# EAGLE board olm-flora-sqw-freescale (EAGLE 6.5.0)

Size 37.26 x 50.79 mm. Coordinates in mm from the lower left corner, seen from the top.
Outline: 0,0 37.26,0 37.26,50.79 0,50.79 0,0
Copper layers (1*16): Top 0.035mm / dielectric 1.5mm / Bottom 0.035mm
Design rules "default": minimum track width 10mil, minimum drill 24mil, track to track 8mil, track to pad 8mil, pad to pad 8mil, via to via 8mil, smd to smd 8mil, copper to edge 40mil, drill to drill 8mil, minimum pad ring 10mil, minimum via ring 8mil, stop-mask expansion 4mil, vias tented up to drill 0mil, thermal gap 10mil
Net classes: 1 power: width 0.203 mm, clearance 0.152 mm

## Footprints (pad centres in the part's own frame; a part is rotated, then mirrored left to right if it is on the bottom)
KMR2 = smd 1 x 1: 1 2,0.8; 2 2,-0.8; 3 -2,0.8; 4 -2,-0.8
C0805 = smd 1.3 x 1.5: 1 -0.85,0; 2 0.85,0
C0805K = smd 1.1 x 1.4: 1 -1,0; 2 1,0
CHIPLED_0805 = smd 1.2 x 1.2: A 0,-1.05; C 0,1.05
JST-PH-2-SMT-RA = smd 1 x 4.6: 1 1,-3.7; 2 -1,-3.7 | smd 1.6 x 3.4: NC1 -3.4,1.5; NC2 3.4,1.5
CON10 = drill 0.914: 1 -5.08,-1.27 | drill 0.914 octagon: 2 -5.08,1.27; 3 -2.54,-1.27; 4 -2.54,1.27; 5 0,-1.27; 6 0,1.27; 7 2.54,-1.27; 8 2.54,1.27; 9 5.08,-1.27; 10 5.08,1.27
SOD-123 = smd 1.2 x 0.7: A 1.85,0; C -1.85,0
TQFP44 = smd 1.5 x 0.5: 1 -5.8,4; 2 -5.8,3.2; 3 -5.8,2.4; 4 -5.8,1.6; 5 -5.8,0.8; 6 -5.8,0; 7 -5.8,-0.8; 8 -5.8,-1.6; 9 -5.8,-2.4; 10 -5.8,-3.2; 11 -5.8,-4; 23 5.8,-4; 24 5.8,-3.2; 25 5.8,-2.4; 26 5.8,-1.6; 27 5.8,-0.8; 28 5.8,0; 29 5.8,0.8; 30 5.8,1.6; 31 5.8,2.4; 32 5.8,3.2; 33 5.8,4 | smd 0.5 x 1.5: 12 -4,-5.8; 13 -3.2,-5.8; 14 -2.4,-5.8; 15 -1.6,-5.8; 16 -0.8,-5.8; 17 0,-5.8; 18 0.8,-5.8; 19 1.6,-5.8; 20 2.4,-5.8; 21 3.2,-5.8; 22 4,-5.8; 34 4,5.8; 35 3.2,5.8; 36 2.4,5.8; 37 1.6,5.8; 38 0.8,5.8; 39 0,5.8; 40 -0.8,5.8; 41 -1.6,5.8; 42 -2.4,5.8; 43 -3.2,5.8; 44 -4,5.8
SO16W = smd 0.6 x 2.2: 1 -4.445,-4.6; 2 -3.175,-4.6; 3 -1.905,-4.6; 4 -0.635,-4.6; 5 0.635,-4.6; 6 1.905,-4.6; 7 3.175,-4.6; 8 4.445,-4.6; 9 4.445,4.6; 10 3.175,4.6; 11 1.905,4.6; 12 0.635,4.6; 13 -0.635,4.6; 14 -1.905,4.6; 15 -3.175,4.6; 16 -4.445,4.6
SOT23-5 = smd 0.55 x 1.2: 1 -0.95,-1.3; 2 0,-1.3; 3 0.95,-1.3; 4 0.95,1.3; 5 -0.95,1.3
SOT23 = smd 1 x 1.4: 1 -0.95,-1.1; 2 0.95,-1.1; 3 0,1.1
AYZ0202 = smd 1 x 1.15: 1 -2.5,2.825; 2 0,2.825; 3 2.5,2.825; 4 -2.5,-2.825; 5 0,-2.825; 6 2.5,-2.825 | hole 0.85: 1.5,0; -1.5,0
2X03 = drill 1.016 octagon: 1 -2.54,-1.27; 2 -2.54,1.27; 3 0,-1.27; 4 0,1.27; 5 2.54,-1.27; 6 2.54,1.27
R1206 = smd 1.6 x 1.803: 1 -1.422,0; 2 1.422,0
R0805 = smd 1.1 x 1.4: 1 -1,0; 2 1,0
R0805' = smd 1.3 x 1.5: 1 -0.95,0; 2 0.95,0
EXB38V = smd 0.6 x 0.8: 1 -1.275,-0.75; 4 1.275,-0.75; 5 1.275,0.75; 8 -1.275,0.75 | smd 0.5 x 0.8: 2 -0.4,-0.75; 3 0.4,-0.75; 6 0.4,0.75; 7 -0.4,0.75
SO08 = smd 0.61 x 2.21: 1_CS -1.905,-2.616; 2_SO -0.635,-2.616; 3_WP 0.635,-2.616; 4_GND 1.905,-2.616; 5_SI 1.905,2.616; 6_SCK 0.635,2.616; 7_HOLD -0.635,2.616; 8_VCC -1.905,2.616
CR1220-SMD = smd 3.2 x 3.2: +$1 -8.2,0; +$2 8.2,0 | smd 3.9 x 3.9: - 0,0
USB-MINIB = smd 2.5 x 0.5: D+ 2.5,0; D- 2.5,0.8; GND 2.5,-1.6; ID 2.5,-0.8; VBUS 2.5,1.6 | smd 2.5 x 2: GND@1 -3,-4.5; GND@2 -3,4.5; GND@3 2.5,4.5; GND@4 2.5,-4.5 | hole 0.9: 0,2.2; 0,-2.2
NX5032 = smd 2 x 2.4: P$1 2,0; P$2 -2,0

## Placement (x,y rotation side)
BOOT  SPST_TACT-KMR2  [KMR2]  34.04,40.39 0 top
C1  10u  [C0805]  28.19,26.92 0 top
C2  18pF  [C0805K]  24.13,40.89 180 top
C3  18pF  [C0805K]  13.97,40.39 270 top
C4  0.1  [C0805K]  25.4,37.08 0 top
C10  10u  [C0805]  28.96,40.89 180 top
C11  10u  [C0805]  10.16,37.34 180 top
CHG  0805  [CHIPLED_0805]  12.95,22.1 90 top
CN2  [JST-PH-2-SMT-RA]  5.59,15.24 0 top
CON1  [CON10]  9.4,46.99 0 top
CON2  [CON10]  27.94,46.99 0 top
CON3  [CON10]  9.4,3.81 180 top
CON4  [CON10]  27.94,3.81 180 top
D1  SCHOTTKY  [SOD-123]  31.5,23.37 90 top
IC1  ATMEGA32U4-AU  [TQFP44]  18.8,30.48 135 top
IC2  DS3231SN  [SO16W]  18.8,14.73 0 top
IC3  MCP73831  [SOT23-5]  9.91,24.64 270 top
IC4  MCP1700-33  [SOT23]  34.04,28.45 0 top
J1  AYZ0202  [AYZ0202]  32,34.8 180 top
JP1  ICSP  [2X03]  3.3,38.61 90 top
L1  500mA  [R1206]  34.04,23.11 270 top
R1  22  [R0805]  8.89,28.45 90 top
R2  22  [R0805]  29.97,29.72 180 top
R3  10k  [R0805]  11.43,17.02 90 top
R4  10k  [R0805]  11.43,11.94 90 top
R5  10k  [R0805]  27.94,24.64 0 top
R6  10k  [R0805]  27.94,22.35 180 top
RC  22K  [R0805']  9.14,33.02 90 top
RN1  [EXB38V]  9.65,41.15 0 top
U$4  AT25F512BJEDEC  [SO08]  4.06,30.23 0 top
U$7  BAT  [CR1220-SMD]  18.8,15.24 0 bottom
X1  USBSMD  [USB-MINIB]  30.99,14.48 180 top
X3  8MHz  [NX5032]  18.54,40.64 180 top

## Library data of the parts
BOOT C2-C4 CN2 D1 IC4 L1 R1-R6 U$7 = adafruit
C1 C10 C11 = resistor
CHG = led
CON1-CON4 = con-harting; OC_FARNELL: unknown; OC_NEWARK: unknown
IC1 X3 = adaprog
IC2 = comfile
IC3 J1 = SparkFunNew
JP1 = pinhead
RC = rcl
RN1 = resistor-dil; OC_FARNELL: unknown; OC_NEWARK: unknown
U$4 = LowPowerLab
X1 = SparkFun

## Nets
32KHZ: IC2.1 R6.1
+3V3: C11.1 CON1.10 CON2.10 CON3.10 CON4.10 IC1.6 IC1.14 IC1.24 IC1.34 IC1.42 IC1.44 IC4.2
+5V: D1.A IC1.7 L1.2
A5: IC1.41
D0/RX: IC1.20
D1/TX: IC1.21
D6*: IC1.27
D7: IC1.1
D8: U$4.1_CS
GND: BOOT.2 BOOT.4 C1.2 C2.2 C3.2 C4.2 C10.2 C11.2 CN2.2 CON1.6 CON2.6 CON3.6 CON4.6 IC1.5 IC1.15 IC1.23 IC1.33 IC1.35 IC1.43 IC2.5 IC2.6 IC2.7 IC2.8 IC2.9 IC2.10 IC2.11 IC2.12 IC2.13 IC3.2 IC4.1 JP1.6 RC.1 U$4.4_GND U$7.- X1.GND
INT/SQW: IC2.3 R3.1
IO9*: IC1.29
IO10*: IC1.30
IO12*: IC1.26
MISO: CON1.5 CON2.5 CON3.5 CON4.5 IC1.11 JP1.1 U$4.2_SO
MOSI: CON1.3 CON2.3 CON3.3 CON4.3 IC1.10 JP1.4 U$4.5_SI
N$1: CHG.C IC3.1
N$2: R2.1 X1.D+
N$3: IC1.3 R1.2
N$4: IC1.4 R2.2
N$5: R1.1 X1.D-
N$8: C2.1 IC1.17 X3.P$2
N$9: C3.1 IC1.16 X3.P$1
N$10: IC3.5 RC.2
N$11: J1.3 J1.6
N$12: CHG.A RN1.4
N$14: CON1.4
N$15: CON1.2
N$16: CON1.9
N$17: CON1.7
PC6: IC1.31
PC7: IC1.32
PD0: IC1.18
PD1: IC1.19
RST: BOOT.1 BOOT.3 IC1.13 IC2.4 JP1.5
RXLED/SS: IC1.8
SCK: CON1.1 CON2.1 CON3.1 CON4.1 IC1.9 JP1.3 U$4.6_SCK
SCL: IC2.16 R4.1
SDA: IC2.15 R5.1
TXLED: IC1.22
VBAT: CN2.1 CON1.8 CON2.8 CON3.8 CON4.8 IC2.14 IC3.3 J1.2 J1.5 U$7.+$1 U$7.+$2
VBUS: C10.1 D1.C IC3.4 L1.1 RN1.5 X1.VBUS
VCC: C4.1 IC2.2 R3.2 R4.2 R5.2 R6.2 U$4.3_WP U$4.7_HOLD U$4.8_VCC
VDD: C1.1 IC4.3 J1.1 J1.4

## Tracks (layer width: path | path; a pad name or v marks a point on that pad's centre or on a via)
32KHZ  (1 unrouted)
+3V3  (11 unrouted)
+5V  (2 unrouted)
GND  (34 unrouted)
INT/SQW  (1 unrouted)
MISO  (6 unrouted)
MOSI  (6 unrouted)
N$1  (1 unrouted)
N$2  (1 unrouted)
N$3  (1 unrouted)
N$4  (1 unrouted)
N$5  (1 unrouted)
N$8  (2 unrouted)
N$9  (2 unrouted)
N$10  (1 unrouted)
N$11  (1 unrouted)
N$12  (1 unrouted)
RST  (4 unrouted)
SCK  (6 unrouted)
SCL  (1 unrouted)
SDA  (1 unrouted)
VBAT  (10 unrouted)
VBUS  (5 unrouted)
VCC  (8 unrouted)
VDD  (3 unrouted)

## Text on the board
tPlace: OLM-PVC